# Altium PCB Voltmetr_MEZ.PcbDoc
Units mm, origin at the board's own origin, x right, y up, seen from the top; angles counter-clockwise.
Board outline 73 x 47 mm, 2 copper layers (Top Layer, Bottom Layer); 32 components, 62 nets, 193 pads, 3 vias.
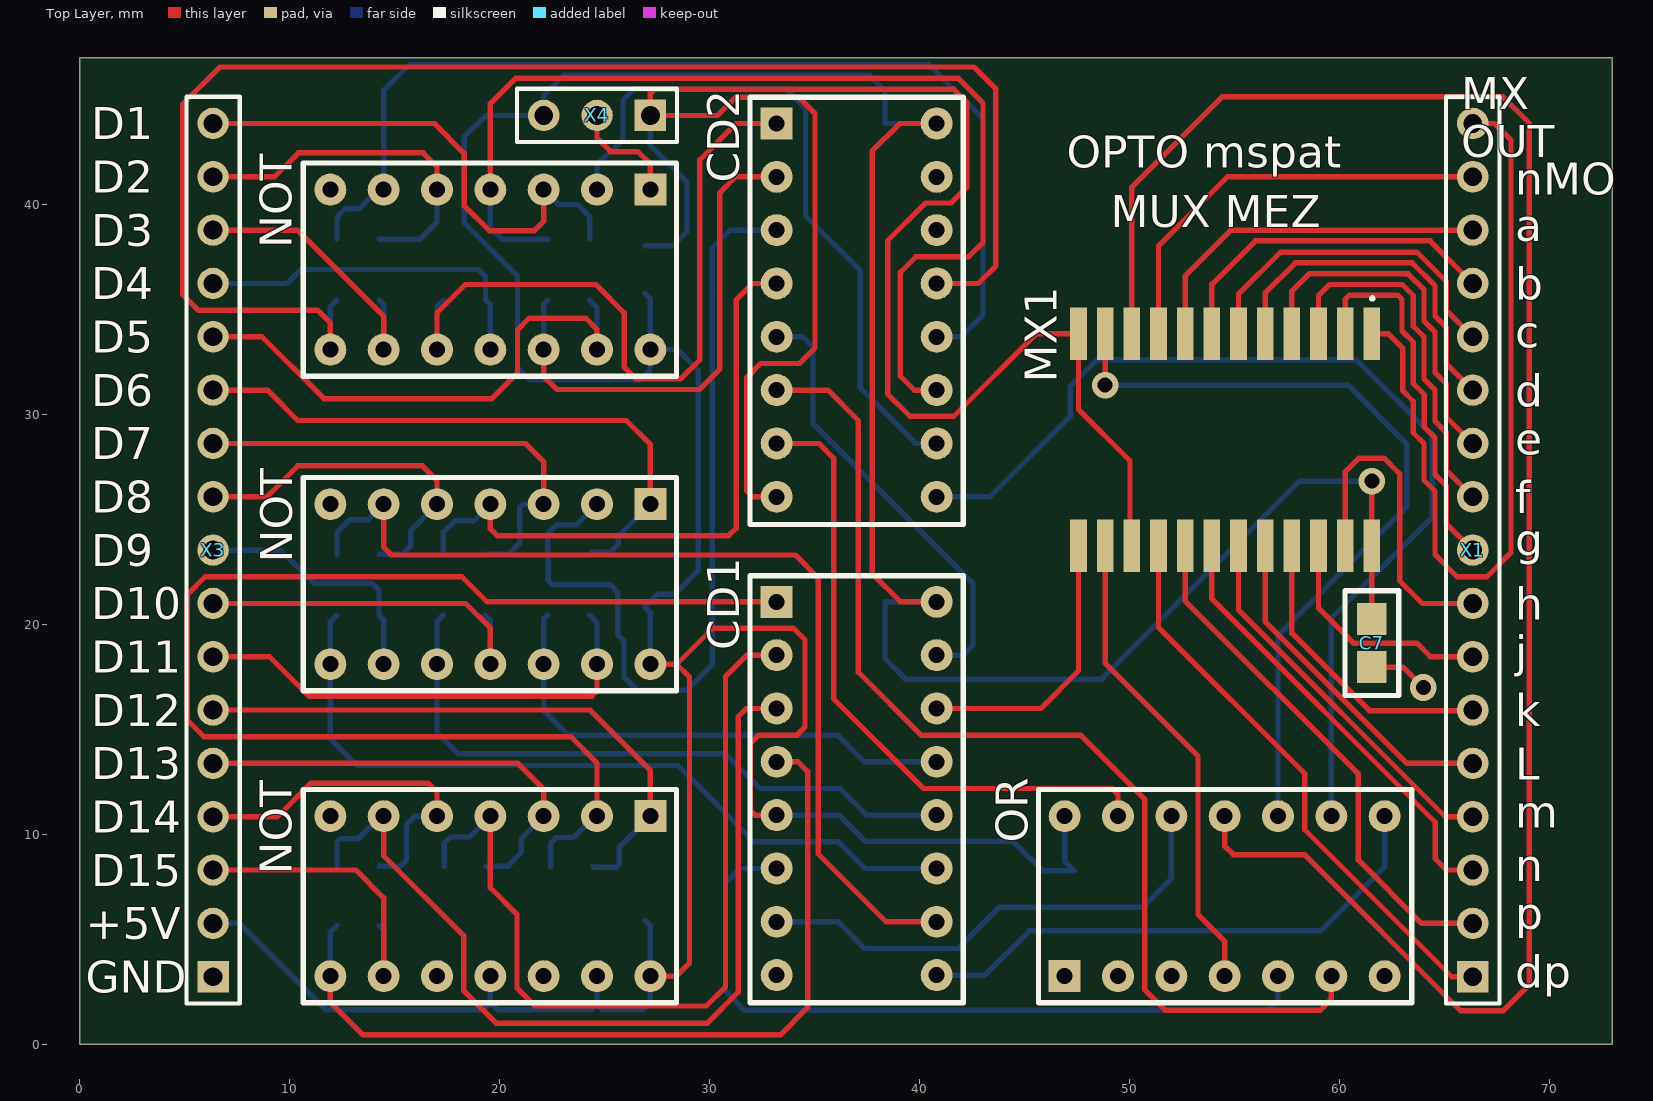
[diagram p0: Top Layer view]
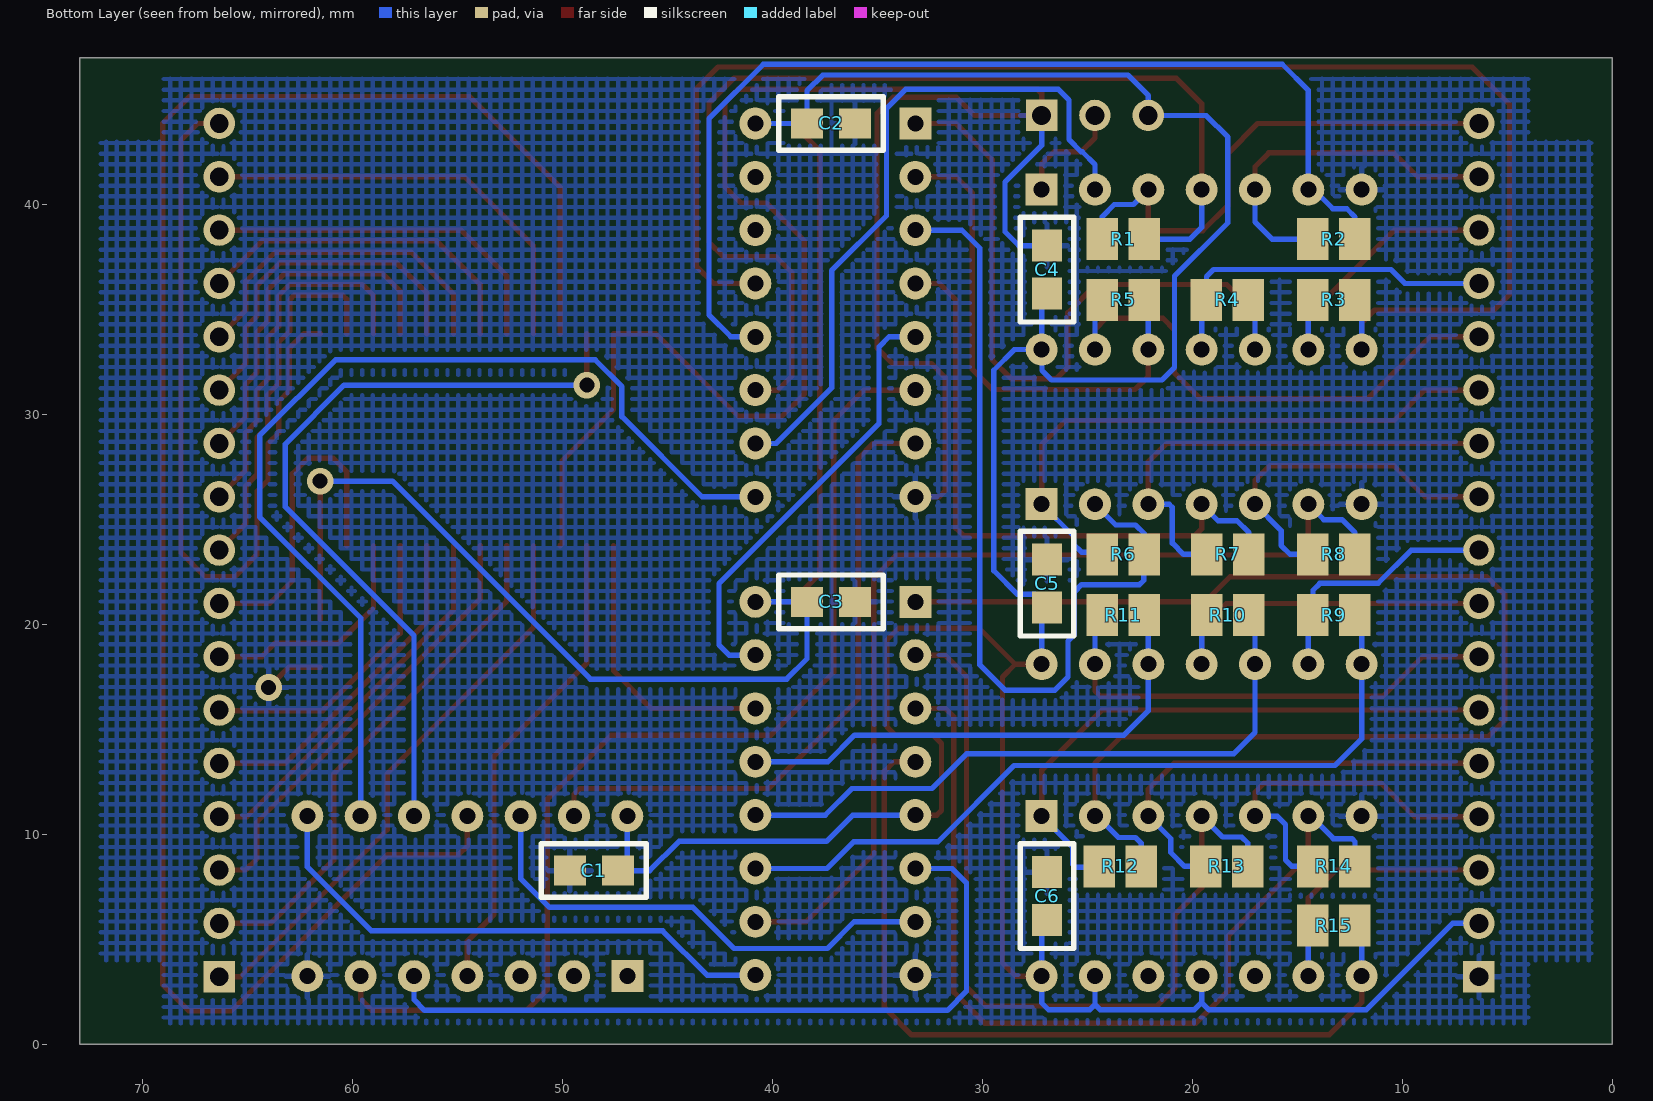
[diagram p1: Bottom Layer view, seen from below]

## Layer stack, top to bottom
Top Solder: solder mask 0.0102, Solder Resist, Dk 3.5
Top Layer: signal copper 0.0356
Dielectric 1: dielectric 0.32, FR-4, Dk 4.8
Bottom Layer: signal copper 0.0356
Bottom Solder: solder mask 0.0102, Solder Resist, Dk 3.5

## Board outline
0,0 73,0 73,47 0,47

## Design rules (kind name [scope] priority, off if disabled: settings)
Clearance [All] p1: gap=0.254 ignorepadtopadclearanceinfootprint=FALSE except(0: Arc-Hole Track-Hole SMDPad-Hole THPad-Hole Via-Hole Fill-Hole Poly-Hole Region-Hole Text-Hole)
PolygonConnect [All] p1: connectstyle=Relief reliefconductorwidth=0.254 reliefentries=4 polygonreliefangle="90 Angle" airgapwidth=0.254
RoutingVias [All] p1: holewidth=0.711 width=1.27 viastyle="Through Hole" minholewidth=0.711 minwidth=1.27 maxholewidth=0.711 maxwidth=1.27
SolderMaskExpansion [All] p1: expansion=0.102 istentingtop=FALSE
Width [All] p1: maxlimit=0.254 minlimit=0.254 preferedwidth=0.254
30 further rules are at their usual default settings.

## Components (designator, comment, footprint, x,y, rotation, side; value= is the part's Value field where it differs from the comment)
C1 "CAP_SMALL" CAP_SMALL 51.021,7.01 r180 bottom
C2 "CAP_SMALL" CAP_SMALL 39.718,42.596 r180 bottom
C3 "CAP_SMALL" CAP_SMALL 34.704,22.352 r0 bottom
C4 "CAP_SMALL" CAP_SMALL 28.194,39.413 r270 bottom
C5 "CAP_SMALL" CAP_SMALL 28.194,24.453 r270 bottom
C6 "CAP_SMALL" CAP_SMALL 28.194,9.568 r270 bottom
C7 "CAP_SMALL" CAP_SMALL 62.814,16.606 r90 top
CD1 "CD4532BE" DIP16_PANNEL 37.008,12.194 r0 top
CD2 "CD4532BE" DIP16_PANNEL 37.008,34.976 r0 top
MX1 "CD74HC4067M96" SOIC-24 61.544,33.857 r270 top
NOT "К561ЛН2" Dip14_pannel 19.561,7.061 r270 top (schematic designator DD4)
NOT "К561ЛН2" Dip14_pannel 19.561,21.92 r270 top (schematic designator DD3)
NOT "К561ЛН2" Dip14_pannel 19.561,36.906 r270 top (schematic designator DD2)
OR "CD4071BE" Dip14_pannel 54.534,7.063 r90 top (schematic designator DD1)
R1 "resistor" "RES 0805" 23.292,38.354 r180 bottom
R2 "resistor" "RES 0805" 13.259,38.354 r180 bottom
R3 "resistor" "RES 0805" 13.259,35.458 r180 bottom
R4 "resistor" "RES 0805" 18.339,35.458 r180 bottom
R5 "resistor" "RES 0805" 23.292,35.458 r180 bottom
R6 "resistor" "RES 0805" 23.292,23.343 r180 bottom
R7 "resistor" "RES 0805" 18.313,23.343 r180 bottom
R8 "resistor" "RES 0805" 13.259,23.343 r180 bottom
R9 "resistor" "RES 0805" 13.259,20.447 r180 bottom
R10 "resistor" "RES 0805" 18.313,20.447 r180 bottom
R11 "resistor" "RES 0805" 23.292,20.447 r180 bottom
R12 "resistor" "RES 0805" 23.444,8.484 r180 bottom
R13 "resistor" "RES 0805" 18.364,8.484 r180 bottom
R14 "resistor" "RES 0805" 13.259,8.484 r180 bottom
R15 "resistor" "RES 0805" 13.259,5.664 r180 bottom
X1 "Header 17" HDR1X17 66.353,3.226 r90 top
X3 "Header 17" HDR1X17 6.353,3.226 r90 top
X4 "Header 3" HDR1X3 27.182,44.247 r180 top

## Footprints (in the part's own frame and the unit in brackets; to place one, negate y for a bottom-side part, rotate by r counter-clockwise, add the part's x,y. Pads: shape width x height; smd on the part's side, far side on the other; paste and mask are expansions set on the pad)
CAP_SMALL [mil] "FROM_MAX"
  rect 60x55.98 smd: 1(53.71,50) 2(143.71,50)
  silkscreen extent 1,0 197,100, body extent 20,18 178,82, height 100
Dip14_pannel [mil]
  rect 60x60 hole 30: 1(-150,300)
  round 60 hole 30: 2(-150,200) 3(-150,100) 4(-150,0) 5(-150,-100) 6(-150,-200) 7(-150,-300) 8(150,-300) 9(150,-200) 10(150,-100) 11(150,0) 12(150,100) 13(150,200) 14(150,300)
  silkscreen extent -200,-351 200,349
DIP16_PANNEL [mil]
  rect 60x60 hole 30: 1(-150,350)
  round 60 hole 30: 2(-150,250) 3(-150,150) 4(-150,50) 5(-150,-50) 6(-150,-150) 7(-150,-250) 8(-150,-350) 9(150,-350) 10(150,-250) 11(150,-150) 12(150,-50) 13(150,50) 14(150,150) 15(150,250) 16(150,350)
  silkscreen extent -200,-402 200,399
HDR1X3 [mm] "Connector; Header; 3 Position"
  rect 1.5x1.5 hole 0.9: 1(0,0)
  round 1.5 hole 0.9: 2(2.54,0) 3(5.08,0)
  silkscreen extent -1.27,-1.27 6.35,1.27
HDR1X17 [mm] "Connector; Header; 17 Position"
  rect 1.5x1.5 hole 0.9: 1(0,0)
  round 1.5 hole 0.9: 2(2.54,0) 3(5.08,0) 4(7.62,0) 5(10.16,0) 6(12.7,0) 7(15.24,0) 8(17.78,0) 9(20.32,0) 10(22.86,0) 11(25.4,0) 12(27.94,0) 13(30.48,0) 14(33.02,0) 15(35.56,0) 16(38.1,0) 17(40.64,0)
  silkscreen extent -1.27,-1.27 41.91,1.27
"RES 0805" [mm]
  rect 1.5x2 smd: 1(-1,0) 2(1,0)
SOIC-24 [mm]
  rect 2.5x0.8 smd: 1(0,0) 2(0,-1.27) 3(0,-2.54) 4(0,-3.81) 5(0,-5.08) 6(0,-6.35) 7(0,-7.62) 8(0,-8.89) 9(0,-10.16) 10(0,-11.43) 11(0,-12.7) 12(0,-13.97) 13(10.1,-13.97) 14(10.1,-12.7) 15(10.1,-11.43) 16(10.1,-10.16) 17(10.1,-8.89) 18(10.1,-7.62) 19(10.1,-6.35) 20(10.1,-5.08) 21(10.1,-3.81) 22(10.1,-2.54) 23(10.1,-1.27) 24(10.1,0)
  silkscreen extent -1.7,0 -1.65,0.05

## Part data
CD1 CD2: "Шифратор приоритетный 8 - 3 [DIP-16]"
MX1: "16-и канальный аналоговый мультиплексор/ демультиплексор, [SO-24]"
NOT NOT NOT: "Шесть логических элементов \"HЕ\" (DIP-14)"
OR: "Четыре логических элемента \"2ИЛИ\", [DIP-14]"
R1 R2 R3 R4 R5 R6 R7 R8 R9 R10 R11 R12 R13 R14 R15: library part RES
X1 X3: "Header, 17-Pin", LatestRevisionDate=17-Jul-2002, LatestRevisionNote="Re-released for DXP Platform.", Publisher="Altium Limited"
X4: "Header, 3-Pin", LatestRevisionDate=17-Jul-2002, LatestRevisionNote="Re-released for DXP Platform.", Publisher="Altium Limited"

## Via types
v1: diameter 1.27, hole 0.711, Top Layer to Bottom Layer, 3 vias

## Nets (pads, with @x,y where several pads share a name; then routed paths per layer and width w, separated by ;. In a path a pad name is that pad's centre, name@x,y a point inside that pad or via, vN(x,y) a via of type N, cw(c..) or ccw(c..) an arc to the next point about the centre after c; other vN are vias at no path point)
\M\O\: MX1.9 X1.16 | length 20.5
  Top Layer w0.254: MX1.9 51.384,38.034 54.676,41.326 X1.16
a: MX1.8 X1.15 | length 17.3
  Top Layer w0.254: MX1.8 52.654,36.604 54.836,38.786 X1.15
b: MX1.7 X1.14 | length 16.5
  Top Layer w0.254: MX1.7 53.924,36.205 55.994,38.275 64.324,38.275 X1.14
c: MX1.6 X1.13 | length 16.3
  Top Layer w0.254: MX1.6 55.194,35.734 57.193,37.733 63.7,37.733 65.083,36.35 65.083,34.976 X1.13
d: MX1.5 X1.12 | length 16.8
  Top Layer w0.254: MX1.5 56.464,35.789 57.9,37.225 63.471,37.225 64.55,36.146 64.55,34.7 65.083,34.167 65.083,32.436 X1.12
D0: NOT.1@27.181,40.716 X4.2 | length 5.3
  Top Layer w0.254: X4.2 24.642,43.176 25.298,42.52 26.594,42.52 27.181,41.933 NOT.1@27.181,40.716
D0': CD2.10 NOT.2@24.641,40.716 | length 33.2
  Bottom Layer w0.254: NOT.2@24.641,40.716 24.641,41.913 25.248,42.52 ; 25.298,42.52 25.883,43.104 25.883,44.987 26.387,45.491 33.659,45.491 34.569,44.581 34.569,39.472 37.186,36.855 37.186,31.267 39.827,28.626 CD2.10
D1: NOT.3@22.101,40.716 R1.1 X3.17 | length 24.8
  Top Layer w0.254: X3.17 16.891,43.866 18.313,42.443 18.313,39.954 19.507,38.76 21.666,38.76 22.101,39.195 NOT.3@22.101,40.716
  Bottom Layer w0.254: NOT.3@22.101,40.716 22.812,40.005 23.724,40.005 24.292,39.437 R1.1
D1': CD2.11 NOT.4@19.561,40.716 R1.2 | length 51.4
  Top Layer w0.254: NOT.4@19.561,40.716 19.561,44.808 20.777,46.025 41.834,46.025 43.028,44.831 43.028,38.202 42.342,37.516 39.827,37.516 39.091,36.779 39.091,31.826 39.751,31.166 CD2.11
  Bottom Layer w0.254: NOT.4@19.561,40.716 19.561,38.91 20.117,38.354 R1.2
D2: NOT.5@17.021,40.716 R2.1 X3.16 | length 17.2
  Top Layer w0.254: X3.16 9.271,41.326 10.414,42.469 16.358,42.469 17.021,41.806 NOT.5@17.021,40.716
  Bottom Layer w0.254: R2.1 16.205,38.354 17.021,39.17 NOT.5@17.021,40.716
D2': CD2.12 NOT.6@14.481,40.716 R2.2 | length 50.7
  Bottom Layer w0.254: R2.2 12.259,39.411 12.649,39.802 13.31,39.802 14.224,40.716 14.481,40.716 14.481,45.443 15.723,46.685 40.437,46.685 43.028,44.094 43.028,34.747 41.986,33.706 CD2.12
D3: NOT.9@14.481,33.096 R3.1 X3.15 | length 13.9
  Top Layer w0.254: X3.15 10.381,38.786 14.481,34.686 NOT.9@14.481,33.096
  Bottom Layer w0.254: R3.1 14.481,35.236 NOT.9@14.481,33.096
D3': CD2.13 NOT.8@11.941,33.096 R3.2 | length 71.9
  Top Layer w0.254: NOT.8@11.941,33.096 11.941,34.363 11.328,34.976 5.639,34.976 4.902,35.712 4.902,44.78 6.68,46.558 42.596,46.558 43.637,45.517 43.637,37.084 42.799,36.246 CD2.13
  Bottom Layer w0.254: NOT.8@11.941,33.096 11.941,35.14 R3.2
D4: NOT.11@19.561,33.096 R4.1 X3.14 | length 17
  Bottom Layer w0.254: X3.14 9.881,36.246 10.541,36.906 18.999,36.906 19.329,36.576 19.329,35.468 R4.1 19.561,35.236 NOT.11@19.561,33.096
D4': CD2.1 NOT.10@17.021,33.096 R4.2 | length 35
  Top Layer w0.254: NOT.10@17.021,33.096 17.021,34.852 18.364,36.195 24.587,36.195 25.933,34.849 25.933,32.258 26.482,31.709 28.636,31.709 29.54,32.614 29.54,42.139 31.267,43.866 CD2.1
  Bottom Layer w0.254: NOT.10@17.021,33.096 17.021,35.14 R4.2
D5: NOT.13@24.641,33.096 R5.1 X3.13 | length 26
  Top Layer w0.254: X3.13 8.687,33.706 11.633,30.759 19.634,30.759 20.853,31.979 20.853,34.036 21.412,34.595 24.105,34.595 24.641,34.059 NOT.13@24.641,33.096
  Bottom Layer w0.254: R5.1 24.641,35.109 NOT.13@24.641,33.096
D5': CD2.2 NOT.12@22.101,33.096 R5.2 | length 24.2
  Top Layer w0.254: NOT.12@22.101,33.096 22.101,31.823 22.733,31.191 29.515,31.191 30.48,32.156 30.48,40.555 31.251,41.326 CD2.2
  Bottom Layer w0.254: NOT.12@22.101,33.096 22.101,35.267 R5.2
D6: NOT.1@27.181,25.73 R6.1 X3.12 | length 28.8
  Top Layer w0.254: X3.12 8.941,31.166 10.389,29.718 26.035,29.718 27.181,28.572 NOT.1@27.181,25.73
  Bottom Layer w0.254: R6.1 24.394,23.445 25.274,23.445 25.654,23.825 25.654,24.203 NOT.1@27.181,25.73
D6': CD2.3 NOT.2@24.641,25.73 R6.2 | length 41.1
  Bottom Layer w0.254: NOT.2@24.641,25.73 23.65,24.74 22.708,24.74 22.292,24.324 R6.2 22.311,23.324 22.311,22.11 22.521,21.9 25.276,21.9 25.625,21.551 25.625,19.513 25.925,19.213 25.925,17.5 26.55,16.875 28.925,16.875 30.124,18.074 30.124,37.922 30.988,38.786 CD2.3
D7: NOT.3@22.101,25.73 R7.1 X3.11 | length 22.9
  Top Layer w0.254: X3.11 21.234,28.626 22.101,27.759 NOT.3@22.101,25.73
  Bottom Layer w0.254: R7.1 20.422,23.343 20.955,23.876 20.955,25.581 21.104,25.73 NOT.3@22.101,25.73
D7': CD2.4 NOT.4@19.561,25.73 R7.2 | length 30.1
  Top Layer w0.254: NOT.4@19.561,25.73 19.561,24.559 19.888,24.232 30.912,24.232 31.267,24.587 31.267,35.458 32.055,36.246 CD2.4
  Bottom Layer w0.254: R7.2 17.313,24.375 17.882,24.943 18.773,24.943 NOT.4@19.561,25.73
D8: NOT.5@17.021,25.73 R8.1 X3.10 | length 16.9
  Top Layer w0.254: X3.10 8.915,26.086 10.389,27.559 16.332,27.559 17.021,26.87 NOT.5@17.021,25.73
  Bottom Layer w0.254: R8.1 15.342,23.343 15.773,23.774 15.773,24.483 NOT.5@17.021,25.73
D8': CD1.10 NOT.6@14.481,25.73 R8.2 | length 47.3
  Top Layer w0.254: NOT.6@14.481,25.73 14.481,23.695 14.862,23.314 34.09,23.314 35.179,22.225 35.179,9.068 38.403,5.844 CD1.10
  Bottom Layer w0.254: R8.2 12.259,24.375 12.878,24.994 13.744,24.994 NOT.6@14.481,25.73
D9: NOT.9@14.481,18.11 R9.1 X3.9 | length 12.3
  Bottom Layer w0.254: X3.9 9.576,23.546 11.151,21.971 11.342,21.971 11.351,21.962 13.929,21.962 14.259,21.631 R9.1 14.481,20.225 NOT.9@14.481,18.11
D9': CD1.11 NOT.8@11.941,18.11 R9.2 | length 37.5
  Bottom Layer w0.254: R9.2 11.941,20.129 11.941,14.551 13.208,13.284 28.499,13.284 32.131,9.652 36.144,9.652 37.413,8.384 CD1.11
D10: NOT.11@19.561,18.11 R10.1 X3.8 | length 17.9
  Top Layer w0.254: X3.8 18.39,21.006 19.561,19.835 NOT.11@19.561,18.11
  Bottom Layer w0.254: R10.1 19.561,20.2 NOT.11@19.561,18.11
D10': CD1.12 NOT.10@17.021,18.11 R10.2 | length 31.1
  Bottom Layer w0.254: R10.2 17.021,20.154 17.021,18.11 17.021,14.856 18.034,13.843 30.759,13.843 32.41,12.192 36.22,12.192 37.489,10.924 CD1.12
D11: NOT.13@24.641,18.11 R11.1 X3.7 | length 22.9
  Top Layer w0.254: X3.7 9.042,18.466 10.922,16.586 24.384,16.586 24.641,16.843 NOT.13@24.641,18.11
  Bottom Layer w0.254: R11.1 24.641,20.098 NOT.13@24.641,18.11
D11': CD1.13 NOT.12@22.101,18.11 R11.2 | length 24.4
  Bottom Layer w0.254: R11.2 22.101,20.256 22.101,18.11 22.101,15.898 23.266,14.732 36.093,14.732 37.362,13.464 CD1.13
D12: NOT.1@27.181,10.871 R12.1 X3.6 | length 28.4
  Top Layer w0.254: X3.6 24.308,15.926 27.181,13.053 NOT.1@27.181,10.871
  Bottom Layer w0.254: R12.1 24.495,8.433 25.556,8.433 25.705,8.582 25.705,9.395 NOT.1@27.181,10.871
D12': CD1.1 NOT.2@24.641,10.871 R12.2 | length 61.6
  Top Layer w0.254: NOT.2@24.641,10.871 24.641,13.408 23.393,14.656 5.918,14.656 5.131,15.443 5.131,21.438 5.969,22.276 18.212,22.276 19.404,21.084 CD1.1
  Bottom Layer w0.254: R12.2 22.444,9.592 22.708,9.855 23.527,9.855 24.543,10.871 NOT.2@24.641,10.871
D13: NOT.3@22.101,10.871 R13.1 X3.5 | length 21.7
  Top Layer w0.254: X3.5 20.879,13.386 22.101,12.164 NOT.3@22.101,10.871
  Bottom Layer w0.254: R13.1 20.371,8.484 21.031,9.144 21.031,9.802 NOT.3@22.101,10.871
D13': CD1.2 NOT.4@19.561,10.871 R13.2 | length 40.8
  Top Layer w0.254: NOT.4@19.561,10.871 19.561,7.465 20.828,6.198 20.828,2.692 21.692,1.829 29.845,1.829 30.759,2.743 30.759,17.526 31.777,18.544 CD1.2
  Bottom Layer w0.254: R13.2 17.364,9.592 17.653,9.881 18.57,9.881 NOT.4@19.561,10.871
D14: NOT.5@17.021,10.871 R14.1 X3.4 | length 17.4
  Top Layer w0.254: X3.4 9.423,10.846 11.024,12.446 16.586,12.446 17.021,12.011 NOT.5@17.021,10.871
  Bottom Layer w0.254: R14.1 15.265,8.484 15.57,8.788 15.57,10.477 15.964,10.871 NOT.5@17.021,10.871
D14': CD1.3 NOT.6@14.481,10.871 R14.2 | length 43.2
  Top Layer w0.254: NOT.6@14.481,10.871 14.481,8.989 18.288,5.182 18.288,2.565 19.837,1.016 29.896,1.016 31.369,2.489 31.369,15.621 31.752,16.004 CD1.3
  Bottom Layer w0.254: R14.2 12.259,9.656 12.408,9.804 13.291,9.804 14.358,10.871 NOT.6@14.481,10.871
D15: NOT.9@14.481,3.251 R15.1 X3.3 | length 14.9
  Top Layer w0.254: X3.3 13.157,8.306 14.481,6.982 NOT.9@14.481,3.251
  Bottom Layer w0.254: R15.1 14.481,5.442 NOT.9@14.481,3.251
D15': CD1.4 NOT.8@11.941,3.251 R15.2 | length 40.6
  Top Layer w0.254: NOT.8@11.941,3.251 11.941,2.004 13.487,0.457 33.376,0.457 34.671,1.753 34.671,13.005 34.212,13.464 CD1.4
  Bottom Layer w0.254: NOT.8@11.941,3.251 11.941,5.346 R15.2
dp: MX1.16 X1.1 | length 27.3
  Top Layer w0.254: MX1.16 51.384,19.866 58.35,12.9 58.35,10.225 65.349,3.226 X1.1
e: MX1.4 X1.11 | length 17.3
  Top Layer w0.254: MX1.4 57.734,35.884 58.55,36.7 63.277,36.7 64.026,35.951 64.026,34.466 64.55,33.942 64.55,32.003 65.083,31.47 65.083,29.896 X1.11
E_cascade: CD1.15 CD2.5 | length 21.2
  Bottom Layer w0.254: CD2.5 34.442,33.706 34.925,33.223 34.925,29.566 42.545,21.946 42.545,19.025 42.064,18.544 CD1.15
f: MX1.3 X1.10 | length 17.5
  Top Layer w0.254: MX1.3 59.004,35.671 59.525,36.192 62.994,36.192 63.518,35.668 63.518,34.214 64.026,33.706 64.026,31.69 64.55,31.166 64.55,29.689 65.083,29.156 65.083,27.356 X1.10
g: MX1.2 X1.9 | length 17.8
  Top Layer w0.254: MX1.2 60.274,35.488 60.47,35.684 62.784,35.684 62.983,35.485 62.983,33.985 63.518,33.45 63.518,31.474 64.042,30.95 64.042,29.408 64.55,28.9 64.55,27.149 65.083,26.616 65.083,24.816 X1.9
GND: C1.1 C2.2 C3.1 C4.1 C5.1 C6.1 C7.1 CD1.8 CD2.8 MX1.12 MX1.15 NOT.7 OR.7 X3.1 X4.1 | length 96.8
  Top Layer w0.254: CD2.8 32.055,26.086 31.775,26.365 31.775,31.775 32.436,32.436 34.29,32.436 35.027,33.172 35.027,44.348 34.265,45.11 31.242,45.11 30.378,44.247 X4.1 27.182,45.301 27.373,45.491 41.631,45.491 42.266,44.856 42.266,40.843 41.504,40.081 40.284,40.081 38.481,38.278 38.481,30.988 39.548,29.921 41.631,29.921 45.567,33.857 MX1.12 47.574,30.251 50.025,27.8 50.025,23.847 MX1.15 ; C7.1 63.03,17.97 v1(64,17)
  Bottom Layer w0.254: C4.1 28.27,38.049 28.931,38.71 28.931,41.069 27.182,42.818 X4.1
h: MX1.23 X1.8 | length 15.7
  Top Layer w0.254: MX1.23 60.274,27.274 60.925,27.925 62.125,27.925 62.875,27.175 62.875,22.075 63.944,21.006 X1.8
j: MX1.22 X1.7 | length 11.3
  Top Layer w0.254: MX1.22 59.004,20.784 60.675,19.113 63.687,19.113 64.334,18.466 X1.7
k: MX1.21 X1.6 | length 14.3
  Top Layer w0.254: MX1.21 57.734,19.591 61.425,15.9 66.327,15.9 X1.6
l: MX1.20 X1.5 | length 16.3
  Top Layer w0.254: MX1.20 56.464,20.142 63.221,13.386 X1.5
m: MX1.19 X1.4 | length 18.3
  Top Layer w0.254: MX1.19 55.194,20.694 65.042,10.846 X1.4
MX_OUT: MX1.1 X1.17 | length 38.6
  Top Layer w0.254: MX1.1 62.318,33.857 63.01,33.165 63.01,31.143 63.518,30.635 63.518,29.134 64.026,28.626 64.026,26.874 64.55,26.35 64.55,23.329 65.603,22.276 67.026,22.276 68.175,23.425 68.175,43.075 67.384,43.866 X1.17
n: MX1.18 X1.3 | length 21.3
  Top Layer w0.254: MX1.18 53.924,21.225 64.567,10.583 64.567,8.839 65.1,8.306 X1.3
p: MX1.17 X1.2 | length 25.1
  Top Layer w0.254: MX1.17 52.654,21.121 60.9,12.875 60.9,8.781 63.915,5.766 X1.2
Q0': MX1.11 OR.10 | length 38.2
  Top Layer w0.254: v1(48.844,31.4) MX1.11
  Bottom Layer w0.254: v1(48.844,31.4) 60.4,31.4 63.2,28.6 63.2,25.6 57.074,19.474 OR.10
Q0_1: CD1.9 OR.8 | length 25.9
  Bottom Layer w0.254: CD1.9 43.124,3.304 45.231,5.41 59.106,5.41 62.154,8.458 OR.8
Q0_2: CD2.9 OR.9 | length 48.8
  Bottom Layer w0.254: CD2.9 43.361,26.086 47.174,29.899 47.174,31.337 48.444,32.607 60.818,32.607 64.425,29 64.425,25.125 59.614,20.314 OR.9
Q1': MX1.10 OR.11 | length 88.9
  Top Layer w0.254: MX1.10 50.114,40.839 54.411,45.136 67.789,45.136 69.05,43.875 69.05,2.85 67.8,1.6 65.778,1.6 58.336,9.042 54.951,9.042 54.534,9.459 OR.11
Q1_1: CD1.7 OR.12 | length 23.7
  Bottom Layer w0.254: CD1.7 36.117,5.844 37.389,4.572 41.834,4.572 43.79,6.528 50.622,6.528 51.994,7.899 OR.12
Q1_2: CD2.7 OR.13 | length 30.9
  Top Layer w0.254: CD2.7 35.204,28.626 35.916,27.915 35.916,16.459 40.183,12.192 49.174,12.192 49.454,11.913 OR.13
Q2': MX1.14 OR.4 | length 22.9
  Top Layer w0.254: MX1.14 48.844,18.161 53.264,13.741 53.264,6.198 54.534,4.928 OR.4
Q2_1: CD1.6 OR.5 | length 35.9
  Bottom Layer w0.254: CD1.6 31.447,8.384 30.759,7.696 30.759,2.54 31.674,1.626 56.566,1.626 57.074,2.134 OR.5
Q2_2: CD2.6 OR.6 | length 52.3
  Top Layer w0.254: CD2.6 35.636,31.166 37.083,29.719 37.083,17.73 40.081,14.732 47.676,14.732 50.724,11.684 50.724,2.616 51.714,1.626 59.08,1.626 59.614,2.159 OR.6
Q3': CD1.14 MX1.13 | length 13.5
  Top Layer w0.254: CD1.14 45.779,16.004 47.574,17.799 MX1.13
V_MB: C1.2 C2.1 C3.2 C4.2 C5.2 C6.2 C7.2 CD1.5 CD1.16 CD2.16 MX1.24 NOT.11@19.561,3.251 NOT.13@24.641,3.251 NOT.14 OR.14 X3.2 X4.3 | length 218
  Top Layer w0.254: NOT.14@27.181,3.251 28.426,3.251 29.05,3.875 29.05,17.5 28.44,18.11 ; NOT.14@27.181,18.11 28.44,18.11 ; CD1.5 32.176,10.924 31.95,11.15 31.95,14.325 32.357,14.732 34.166,14.732 34.55,15.116 34.55,19.275 34,19.825 30.155,19.825 28.44,18.11 ; CD1.16 39.091,21.084 37.744,22.431 37.744,42.544 39.066,43.866 CD2.16 ; C7.2 MX1.24 v1(61.544,26.831)
  Bottom Layer w0.254: X3.2 7.609,5.766 11.725,1.65 19.204,1.65 19.561,2.007 ; NOT.11@19.561,3.251 19.561,2.007 ; NOT.13@24.641,3.251 24.641,1.905 ; C6.2 27.181,5.661 27.181,3.251 27.181,1.988 26.843,1.65 24.896,1.65 24.641,1.905 ; C4.2 27.181,35.506 NOT.14@27.181,33.096 ; NOT.14@27.181,18.11 27.181,20.546 C5.2 26.924,20.854 27.508,21.438 28.338,21.438 29.464,22.564 29.464,32.111 28.479,33.096 NOT.14@27.181,33.096 ; CD1.5 36.176,10.924 37.425,9.675 44.458,9.675 45.852,8.28 C1.2 46.914,8.738 OR.14 ; CD1.16 38.356,21.084 C3.2 38.354,18.371 39.325,17.4 48.675,17.4 58.106,26.831 v1(61.544,26.831) ; CD2.16 C2.1 38.354,45.428 37.604,46.177 23.077,46.177 22.1,45.2 22.1,44.249 X4.3 19.347,44.247 18.313,43.213 18.313,39.137 20.853,36.597 20.853,32.247 21.45,31.65 26.713,31.65 27.165,32.102 27.165,33.081 NOT.14@27.181,33.096 ; 19.561,2.007 19.917,1.65 24.386,1.65 24.641,1.905
pads on no net: CD2.14 CD2.15 NOT.10@17.021,3.251 NOT.12@22.101,3.251 OR.1 OR.2 OR.3

## Polygon pours and split planes (outlines as drawn)
GND on Bottom Layer "NONET_L-01_P-001" (hatched 90Degree grid 0.508 track 0.203, remove dead copper, pour order 0): 1,46 72,46 72,1 1,1

## Other copper
Bottom Layer:
  pour cut-out: 0,0 0,4 4,4 4,0
  pour cut-out: 73,0 73,4 69,4 69,0
  pour cut-out: 73,47 69,47 69,43 73,43
  pour cut-out: 0,47 4,47 4,43 0,43

## Silkscreen, mask and mechanical layers (free items; w line width, h text height)
Top Overlay:
  text "D1" at 0.556,43.104 h1.52
  text "MX / OUT" at 65.804,42.265 h1.52
  text "OPTO mspat" at 47.015,41.757 h1.52
  text "D2" at 0.556,40.564 h1.52
  text "nMO" at 68.379,40.479 h1.52
  text "MUX MEZ" at 49.098,38.913 h1.52
  text "a" at 68.375,38.258 h1.52
  text "D3" at 0.556,38.024 h1.52
  text "D4" at 0.556,35.484 h1.52
  text "b" at 68.375,35.464 h1.52
  text "c" at 68.375,33.178 h1.52
  text "D5" at 0.556,32.944 h1.52
  text "D6" at 0.556,30.404 h1.52
  text "d" at 68.375,30.384 h1.52
  text "e" at 68.375,28.098 h1.52
  text "D7" at 0.556,27.864 h1.52
  text "D8" at 0.556,25.324 h1.52
  text "f" at 68.375,25.304 h1.52
  text "g" at 68.375,23.272 h1.52
  text "D9" at 0.556,22.784 h1.52
  text "D10" at 0.556,20.244 h1.52
  text "h" at 68.375,20.224 h1.52
  text "j" at 68.375,17.938 h1.52
  text "D11" at 0.556,17.704 h1.52
  text "D12" at 0.556,15.164 h1.52
  text "k" at 68.375,15.144 h1.52
  text "D13" at 0.556,12.624 h1.52
  text "L" at 68.375,12.604 h1.52
  text "m" at 68.375,10.318 h1.52
  text "D14" at 0.556,10.084 h1.52
  text "n" at 68.375,7.778 h1.52
  text "D15" at 0.556,7.544 h1.52
  text "p" at 68.375,5.492 h1.52
  text "+5V" at 0.3,5.004 h1.52
  text "dp" at 68.375,2.698 h1.52
  text "GND" at 0.3,2.464 h1.52
Mechanical 1:
  the board outline again, w0.254